# Altium PCB PCB.PcbDoc
Units mil, origin at the board's own origin, x right, y up, seen from the top; angles counter-clockwise.
Board outline 1625 x 590 mil, 4 copper layers (Top Layer, GND, 3V3, Bottom Layer), stack 23.756 mil thick; 40 components, 31 nets, 170 pads, 72 vias.
Unrouted connection lines stored in the file: 1.
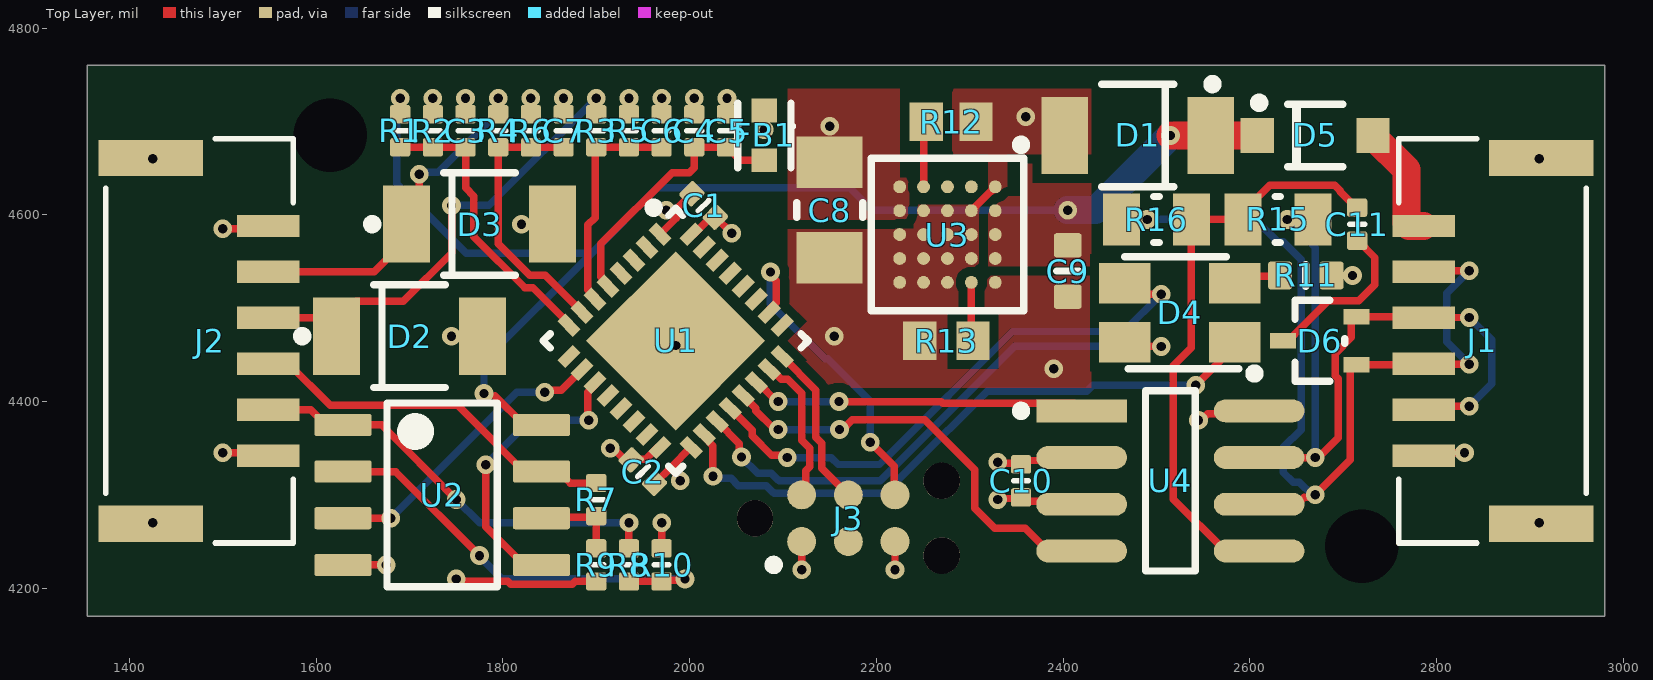
[diagram p0: Top Layer view]
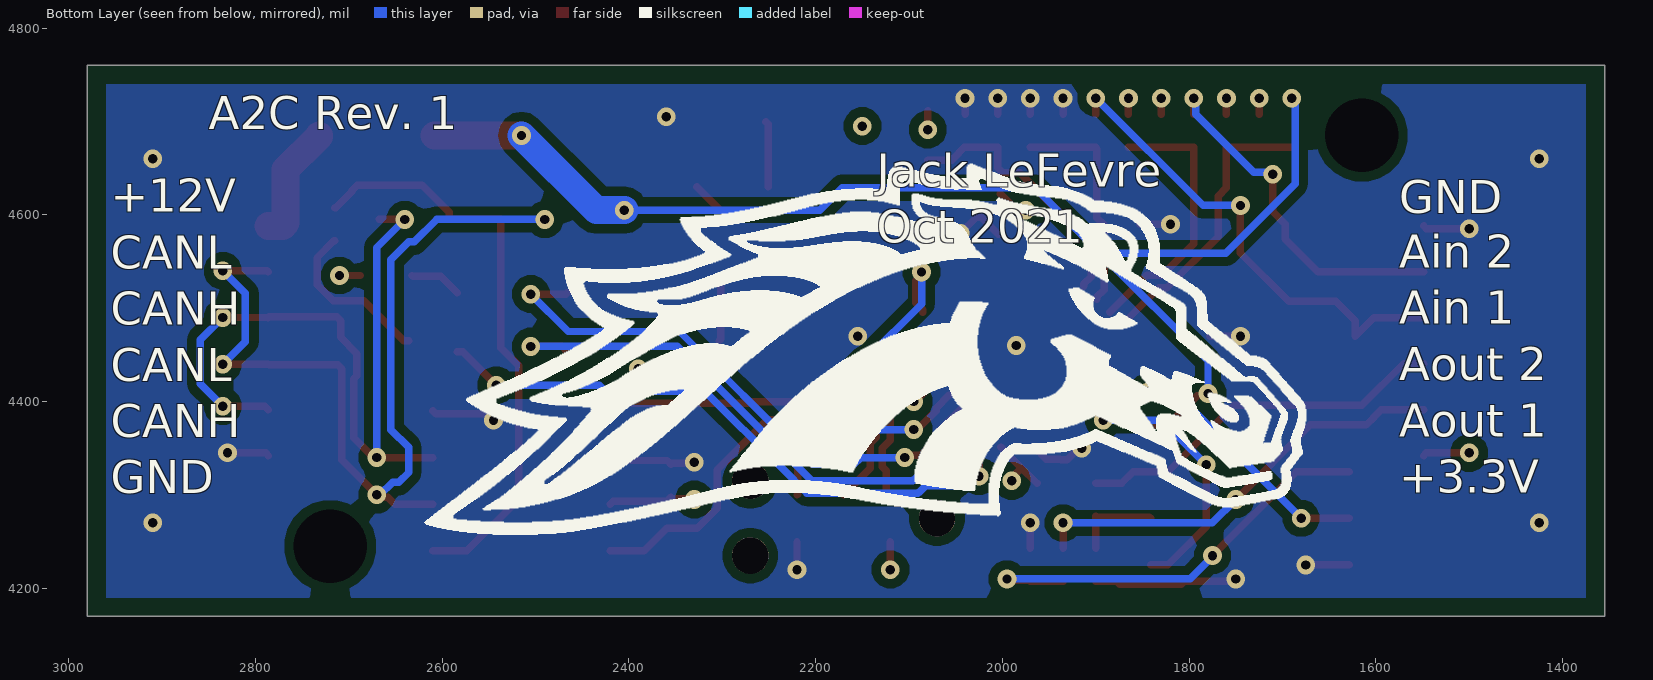
[diagram p1: Bottom Layer view, seen from below]
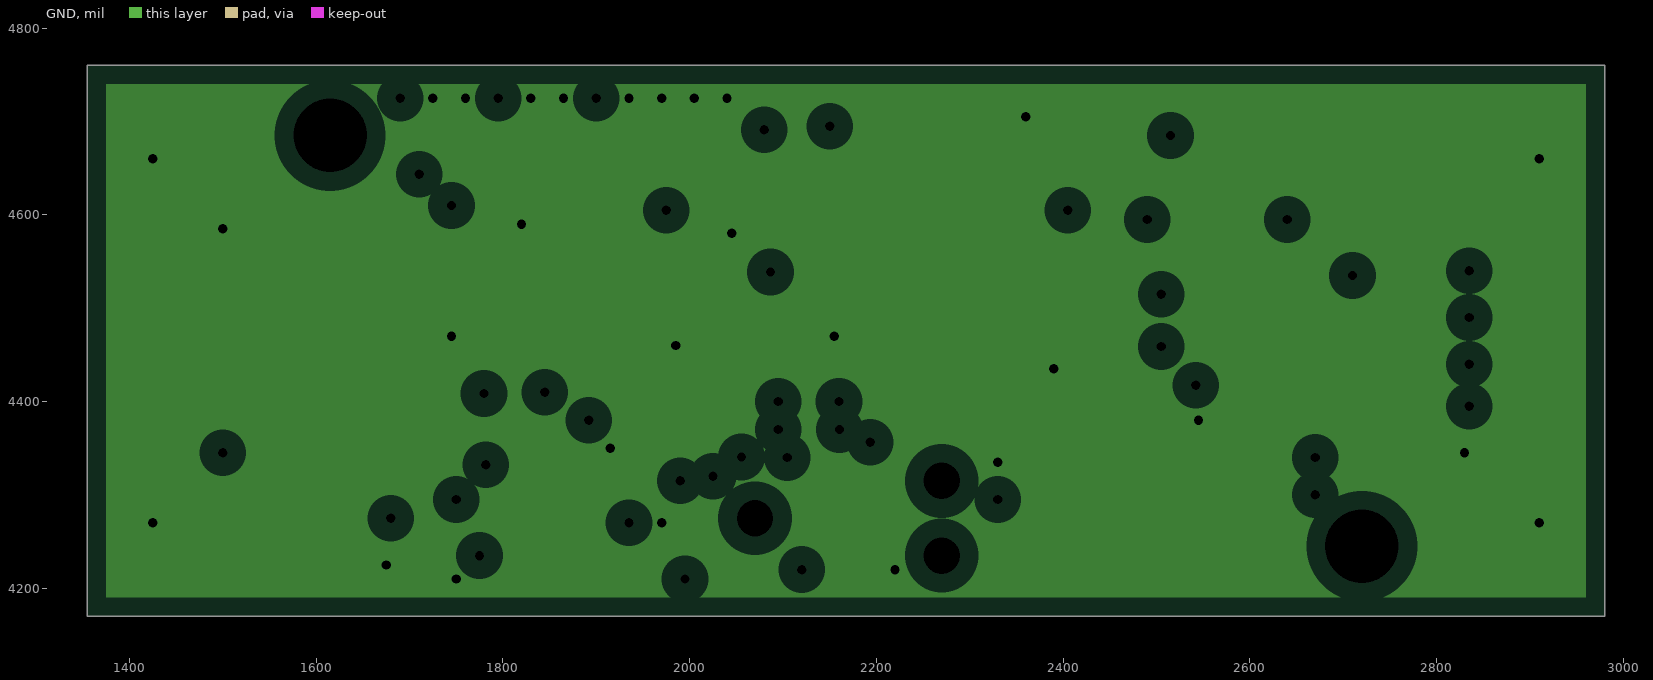
[diagram p2: GND, clearances drawn from the general rule]
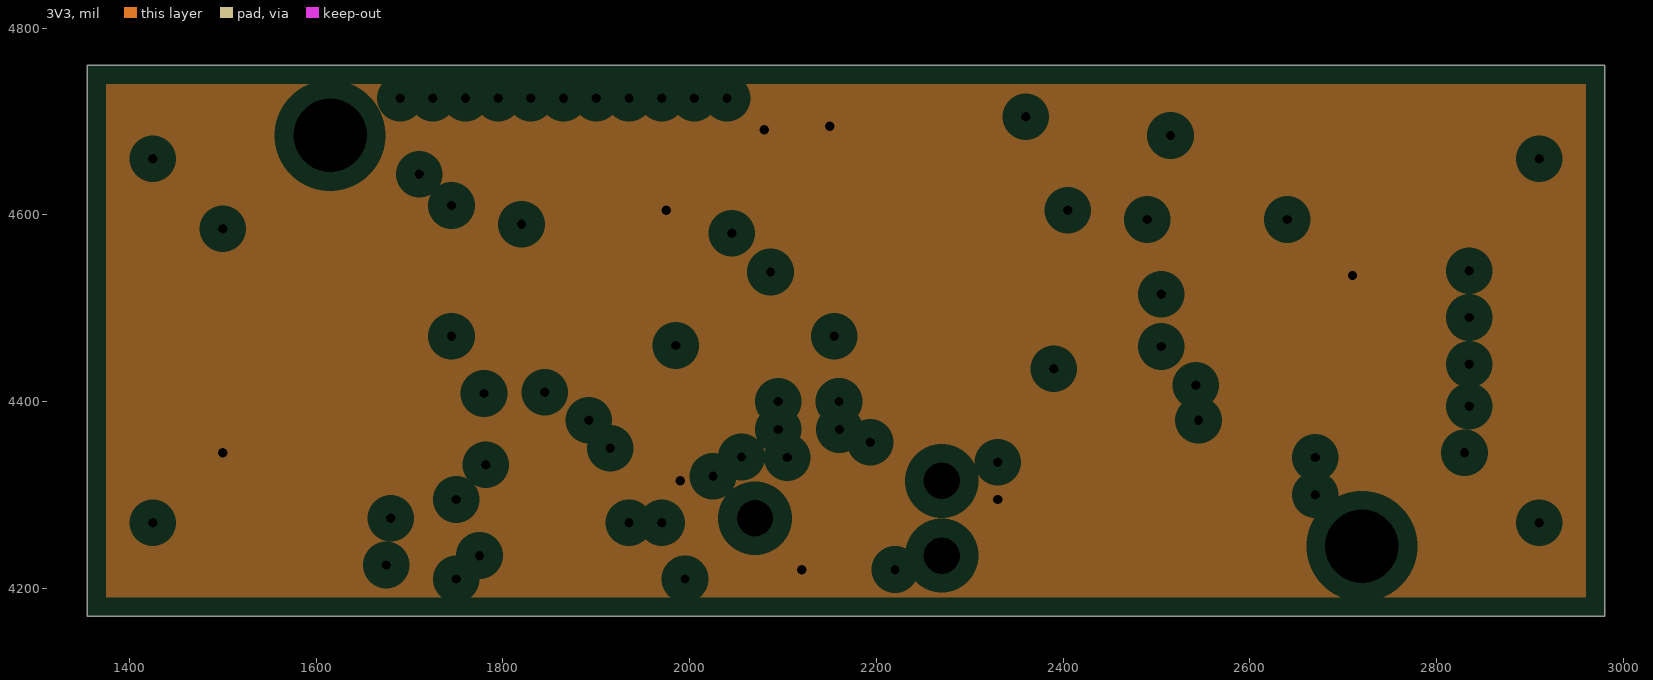
[diagram p3: 3V3, clearances drawn from the general rule]
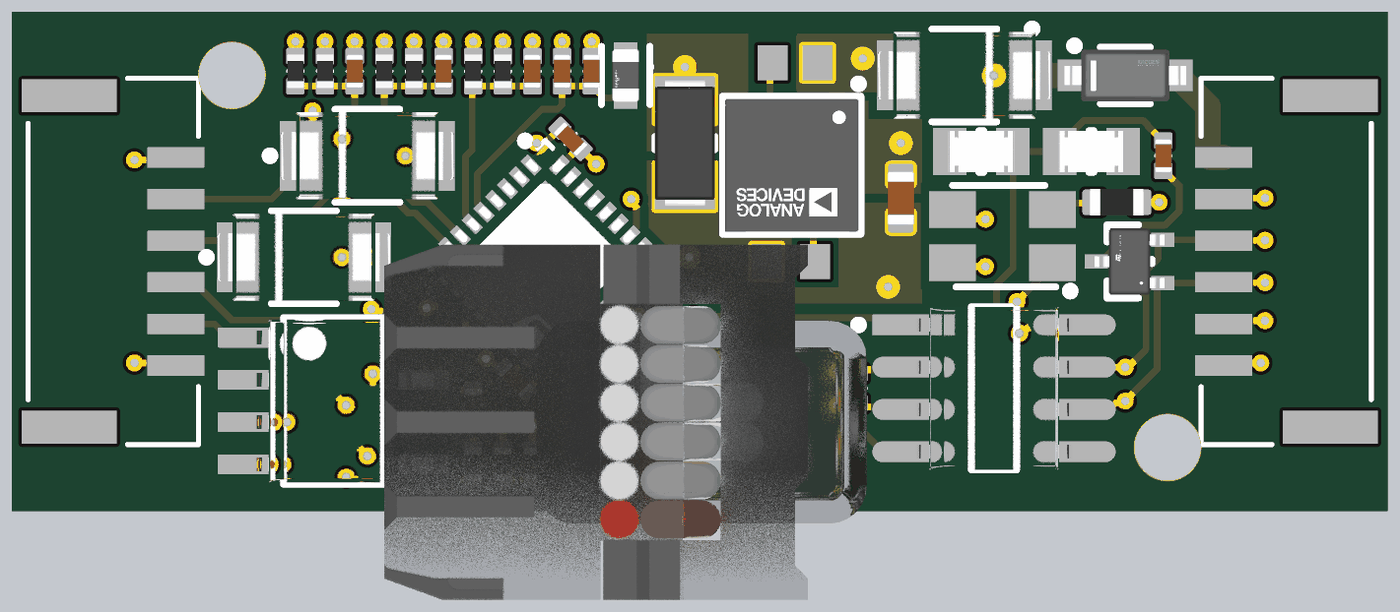
[diagram p4: 3D render of the assembled board from above, using the file's embedded part models]

## Layer stack, top to bottom
Top Solder: solder mask 0.4, Solder Resist, Dk 3.5
Top Layer: signal copper 1.4
Dielectric 2: prepreg 2.8, PP-006, Dk 4.1
GND: plane copper 1.378, net GND
Dielectric 1: dielectric 12.6, FR-4, Dk 4.8
3V3: plane copper 1.378, net 3V3
Dielectric 3: prepreg 2.8, PP-006, Dk 4.1
Bottom Layer: signal copper 1.4
Bottom Solder: solder mask 0.4, Solder Resist, Dk 3.5

## Board outline
1355,4760 2980,4760 2980,4170 1355,4170

## Design rules (kind name [scope] priority, off if disabled: settings)
Clearance [All] p1: gap=10 ignorepadtopadclearanceinfootprint=TRUE except(0: Arc-Hole Track-Hole SMDPad-Hole THPad-Hole Via-Hole Fill-Hole Poly-Hole Region-Hole Text-Hole; 5: Arc-Arc Arc-Track Arc-SMDPad Track-Track Track-SMDPad SMDPad-SMDPad)
PlaneClearance [All] p1: clearance=20
PlaneConnect [All] p1: pad.planeconnectstyle=Relief pad.reliefexpansion=20 pad.reliefentries=4 pad.reliefconductorwidth=10 pad.reliefairgap=10 via.planeconnectstyle=Direct via.reliefexpansion=20 via.reliefentries=4 via.reliefconductorwidth=10 via.reliefairgap=10
PolygonConnect [All] p1: connectstyle=Direct reliefconductorwidth=10 reliefentries=4 polygonreliefangle="90 Angle" airgapwidth=10
RoutingVias [All] p1: holewidth=10 width=20 viastyle="Through Hole" minholewidth=10 minwidth=20 maxholewidth=28 maxwidth=50
SolderMaskExpansion [All] p1: expansion=4 istentingtop=FALSE
Width [All] p1: maxlimit=30 minlimit=8 preferedwidth=8 minimp=50.000000 maximp=50.000000 favimp=50.000000
28 further rules are at their usual default settings.

## Classes and differential pairs
component class a2c: D5 J1 J2 J3
component class "Voltage regulator": C8 C9 R12 R13 U3
component class "CAN Transceiver": C10 C11 D6 R15 R16 U4
component class STM32: C1 C2 C3 C4 C5 C6 C7 D1 D2 D3 D4 FB1 R1 R2 R3 R4 R5 R6 R7 R8 R9 R10 R11 U1 U2

## Components (designator, comment, footprint, x,y, rotation, side; value= is the part's Value field where it differs from the comment)
C1 "100nF" CAPC0402(1005)60_L 2015,4610 r135 top
C2 "100nF" CAPC0402(1005)60_L 1950,4325 r135 top
C3 "100nF" CAPC0402(1005)60_L 1760,4690 r270 top
C4 "1uF" CAPC0402(1005)60_L 2005,4690 r90 top value=1µF
C5 "100nF" CAPC0402(1005)60_L 2040,4690 r90 top
C6 "100nF" CAPC0402(1005)60_L 1970,4690 r270 top
C7 "100nF" CAPC0402(1005)60_L 1865,4690 r270 top
C8 "TAJA106K016RNJ" CAPMP3217X18-T_V 2150,4605 r270 top value=10µF
C9 "Capacitor 1µF +/-40% 50V 0603" CAPC0603(1608)100_L 2405,4539.8 r90 top value=1µF
C10 "100nF" CAPC0402(1005)60_L 2355,4315 r90 top
C11 "100nF" CAPC0402(1005)60_L 2715,4590 r90 top
D1 "SMAJ15A" FP-SMA-MFG 2480,4685 r180 top
D2 "SMAJ6.0A" FP-SMA-MFG 1700,4470 r0 top
D3 "SMAJ6.0A" FP-SMA-MFG 1775,4590 r0 top
D4 "CLV1A-FKB-CHMKPEHBB7A363" FP-CLV1A-FKB-CHMKPEHBB7A3-MFG 2525,4495 r180 top
D5 "B140HW-7" FP-SOD123-MFG 2670,4685 r0 top value=120pF
D6 "ESDCAN02-2BWY" FP-SOT323-3L-MFG 2675,4465 r180 top value=3pF
FB1 "BLM18TG601TN1D" FP-BLM18-0_15-0_1-t0_6-MFG 2080,4685 r270 top
J1 "SM06B-GHS-TB(LF)(SN)" CONN_SM06B-GHS-TB_JST 2860,4465 r90 top
J2 "SM06B-GHS-TB(LF)(SN)" CONN_SM06B-GHS-TB_JST 1475,4465 r270 top
J3 "TC2030-CTX-NL" Tag_Connect_0_MFG 2170,4275 r0 top
R1 "Resistor 100K +/-1 % 0402 63 mW" RESC0402(1005)_L 1690,4690 r90 top value=100k
R2 "10K" RESC0402(1005)_L 1725,4690 r270 top value=10k
R3 "Resistor 5K6  +/-5 % 0402 63 mW" RESC0402(1005)_L 1900,4690 r270 top value=5.6k
R4 "Resistor 5K6  +/-5 % 0402 63 mW" RESC0402(1005)_L 1795,4690 r270 top value=5.6k
R5 "10K" RESC0402(1005)_L 1935,4690 r90 top value=10k
R6 "10K" RESC0402(1005)_L 1830,4690 r90 top value=10k
R7 "Resistor 5K6  +/-5 % 0402 63 mW" RESC0402(1005)_L 1900,4295 r90 top value=5.6k
R8 "Resistor 5K6  +/-5 % 0402 63 mW" RESC0402(1005)_L 1935,4225 r90 top value=5.6k
R9 "10K" RESC0402(1005)_L 1900,4225 r90 top value=10k
R10 "10K" RESC0402(1005)_L 1970,4225 r270 top value=10k
R11 "Resistor 120R +/-5 % 0603 0.1 W" RESC0603(1608)_L 2660,4535 r180 top value=120
R12 "76.8K" RESC1609X50X30ML10T20 2280,4699.8 r180 top
R13 "23.7K" RESC1608X55X30ML15T15 2275,4465 r0 top
R15 "59" FP-CRCW0805-e3-IPC_B 2630,4595 r0 top
R16 "59" FP-CRCW0805-e3-IPC_B 2500,4595 r0 top
U1 "STM32L432KCU6" FP-UFQFPN32-A0B8-MFG 1985,4465 r315 top
U2 "LM358DR" FP-D0008A-MFG 1735,4300 r0 top
U3 "LTM8074EY#PBF" FP-BGA-25-05-08-1566-MFG 2276.18,4578.82 r270 top
U4 "SN65HVD230DR" FP-D0008A-IPC_A 2515,4315 r0 top

## Footprints (in the part's own frame and the unit in brackets; to place one, negate y for a bottom-side part, rotate by r counter-clockwise, add the part's x,y. Pads: shape width x height; smd on the part's side, far side on the other; paste and mask are expansions set on the pad)
CAPC0402(1005)60_L [mm] "Chip Capacitor, Body 1.0x0.5mm, Height 0.6mm, IPC High Density"
  rrect25% 0.5x0.55 smd: 1(-0.45,0) 2(0.45,0)
  silkscreen extent 0,-0.2 0,0.2, body extent -0.5,-0.25 0.5,0.25, height 0.6
CAPC0603(1608)100_L [mm] "Chip Capacitor, Body 1.6x0.8mm, Height 1.0mm, IPC High Density"
  rrect25% 0.66x0.76 smd: 1(-0.7,0) 2(0.7,0)
  silkscreen extent 0,-0.3 0,0.3, body extent -0.8,-0.4 0.8,0.4, height 0.95
CAPMP3217X18-T_V [mm] "Molded Capacitor, 2-Leads, Body 3.40x1.8mm"
  rect 1.4x1.8 smd: 1(-1.3,0) 2(1.3,0)
  silkscreen extent -2.34,-1.07 0.2,0.9, body extent -1.92,-0.9 1.92,0.9, height 1.8
CONN_SM06B-GHS-TB_JST [mil]
  rect 24x67 smd paste+0 mask+0: 1(-123.03,73.85) 2(-73.82,73.85) 3(-24.61,73.85) 4(24.61,73.85) 5(73.82,73.85) 6(123.03,73.85)
  rect 39x112 smd: 7(-195.87,-52.14) 8(195.87,-52.14)
  silkscreen extent -216,-101 216,101, body extent 0,0 10,10, height 10
FP-BGA-25-05-08-1566-MFG [mm]
  round 0.35 smd paste+0 mask+0: A1(-1.3,1.3) A2(-0.65,1.3) A3(0,1.3) A4(0.65,1.3) A5(1.3,1.3) B1(-1.3,0.65) B2(-0.65,0.65) B3(0,0.65) B4(0.65,0.65) B5(1.3,0.65) C1(-1.3,0) C2(-0.65,0) C3(0,0) C4(0.65,0) C5(1.3,0) D1(-1.3,-0.65) D2(-0.65,-0.65) D3(0,-0.65) D4(0.65,-0.65) D5(1.3,-0.65) E1(-1.3,-1.3) E2(-0.65,-1.3) E3(0,-1.3) E4(0.65,-1.3) E5(1.3,-1.3)
  silkscreen extent -2.57,-2.07 2.07,2.13, body extent -2.58,-2.58 2.58,2.58, height 0.25
FP-BLM18-0_15-0_1-t0_6-MFG [mm]
  rect 0.65x0.7 smd paste+0 mask+0: 1(-0.675,0) 2(0.675,0)
  silkscreen extent -0.87,-0.72 0.87,0.72, body extent -1.1,-0.58 1.1,0.58, height 0.25
FP-CLV1A-FKB-CHMKPEHBB7A3-MFG [mm]
  rect 1.4x1.1 smd paste+0 mask+0: 1(-1.5,0.8) 2(-1.5,-0.8) 3(1.5,-0.8) 4(1.5,0.8)
  silkscreen extent -2.16,-1.52 1.5,1.78
FP-CRCW0805-e3-IPC_B [mil]
  rect 39.63x55.44 smd paste+0 mask+0: 1(-37.44,0) 2(37.44,0)
  silkscreen extent -3,-25 3,25, body extent -67,-38 67,38, height 10
FP-D0008A-IPC_A [mil]
  rect 97.21x24.49 smd paste+0 mask+0: 1(-95.02,75)
  rrect100% 97.21x24.49 smd paste+0 mask+0: 2(-95.02,25) 3(-95.02,-25) 4(-95.02,-75) 5(95.02,-75) 6(95.02,-25) 7(95.02,25) 8(95.02,75)
  silkscreen extent -165,-97 27,97, body extent -163,-116 163,116, height 10
FP-D0008A-MFG [mm]
  rrect17% 1.55x0.6 smd paste+0 mask+0: 1(-2.7,1.905) 2(-2.7,0.635) 3(-2.7,-0.635) 4(-2.7,-1.905) 5(2.7,-1.905) 6(2.7,-0.635) 7(2.7,0.635) 8(2.7,1.905)
  silkscreen extent -1.5,-2.5 1.5,2.5, body extent -3.57,-2.75 3.57,2.75, height 0.25
FP-SMA-MFG [mm]
  rect 1.27x2.1 smd paste+0 mask+0: 1(-1.985,0) 2(1.985,0)
  silkscreen extent -2.16,-1.52 0.97,1.4, body extent -2.72,-1.5 2.72,1.5, height 0.25
FP-SOD123-MFG [mm]
  rect 0.9x0.95 smd paste+0 mask+0: 1(-1.575,0) 2(1.575,0)
  silkscreen extent -1.65,-0.85 0.75,1.01, body extent -2.12,-0.95 2.12,0.95, height 0.25
FP-SOT323-3L-MFG [mm]
  rect 0.7x0.42 smd paste+0 mask+0: 1(-1,0.65) 2(-1,-0.65) 3(1,0)
  silkscreen extent -0.67,-1.1 0.67,1.1, body extent -1.45,-1.2 1.45,1.2, height 0.25
FP-UFQFPN32-A0B8-MFG [mm]
  rect 0.6x0.3 smd paste+0 mask+0: 1(-2.35,1.75) 2(-2.35,1.25) 3(-2.35,0.75) 4(-2.35,0.25) 5(-2.35,-0.25) 6(-2.35,-0.75) 7(-2.35,-1.25) 8(-2.35,-1.75) 17(2.35,-1.75) 18(2.35,-1.25) 19(2.35,-0.75) 20(2.35,-0.25) 21(2.35,0.25) 22(2.35,0.75) 23(2.35,1.25) 24(2.35,1.75)
  rect 0.3x0.6 smd paste+0 mask+0: 9(-1.75,-2.35) 10(-1.25,-2.35) 11(-0.75,-2.35) 12(-0.25,-2.35) 13(0.25,-2.35) 14(0.75,-2.35) 15(1.25,-2.35) 16(1.75,-2.35) 25(1.75,2.35) 26(1.25,2.35) 27(0.75,2.35) 28(0.25,2.35) 29(-0.25,2.35) 30(-0.75,2.35) 31(-1.25,2.35) 32(-1.75,2.35)
  rect 3.45x3.45 smd paste+0 mask+0: 33(0,0)
  silkscreen extent -3.11,-2.55 2.55,2.55, body extent -2.75,-2.75 2.75,2.75, height 0.25
RESC0402(1005)_L [mm] "Chip Resistor, Body 1.0x0.5mm, IPC High Density"
  rrect25% 0.5x0.55 smd: 1(-0.45,0) 2(0.45,0)
  silkscreen extent 0,-0.2 0,0.2, body extent -0.5,-0.25 0.5,0.25, height 0.3
RESC0603(1608)_L [mm] "Chip Resistor, Body 1.6x0.8mm, IPC High Density"
  rrect25% 0.66x0.76 smd: 1(-0.7,0) 2(0.7,0)
  silkscreen extent 0,-0.3 0,0.3, body extent -0.8,-0.4 0.8,0.4, height 0.45
RESC1608X55X30ML15T15 [mm] "Chip Resistor, 2-Leads, Body 1.60x0.80mm, IPC Low Density"
  rect 0.9x1.05 smd: 1(-0.725,0) 2(0.725,0)
  body extent -0.87,-0.48 0.87,0.48, height 0.55
RESC1609X50X30ML10T20 [mm] "Chip Resistor, 2-Leads, Body 1.55x0.85mm, IPC Low Density"
  rect 0.9x1.05 smd: 1(-0.675,0) 2(0.675,0)
  body extent -0.82,-0.48 0.82,0.48, height 0.5
Tag_Connect_0_MFG [mil]
  round 30.98 smd paste-39370.1 mask+0: 1(-50,-25) 2(-50,25) 3(0,-25) 4(0,25) 5(50,-25) 6(50,25)
  round 39.02 hole 39.02 unplated paste-39370.1 mask+0: ""(-100,0) ""(100,-40) ""(100,40)
  silkscreen extent -85,-55 -75,-45, body extent -199,-124 199,124, height 10

## Part data
C1 C2 C3 C5 C6 C7 C10 C11: library part CMP-001-00061-2, "Chip Capacitor, 100nF +/-20%, 10V, 0402, Thickness 0.6 mm", Case/Package=0402, Max Operating Temperature=85°C, Min Operating Temperature=-55°C, Tolerance=20%, Voltage Rating=10V, Mounting Technology=SMT, Pins=2
C4: library part CMP-001-00063-2, "Chip Capacitor, 1µF +/-20%, 10V, 0402, Thickness 0.6 mm", Case/Package=0402, Max Operating Temperature=85°C, Min Operating Temperature=-55°C, Tolerance=10%, Voltage Rating=10V, Mounting Technology=SMT, Pins=2
C8: library part CMP-001-00041-6, "Standard Tantalum, 10 uF, +/- 10%, 16 V, -55 to 125 degC, 1206 (3216 Metric), RoHS, Tape and Reel", Capacitor Type=Tantalum, Case/Package=1206, Manufacturer=AVX, Max Operating Temperature=125°C, Min Operating Temperature=-55°C, Package Description="2-Pin Surface Mount Device, Body 3.2 x 1.65 mm", Package Quantity=1, Package Reference=CAPMP3217X18-T, Tolerance=10%, Voltage Rating=16V, Datasheet URL=http://datasheets.avx.com/TAJ.pdf, Datasheet Version=Feb-16, ESR=3Ohm, Manufacturer URL=http://www.avx.com/, Mounting Technology=SM, Package URL=http://www.avx.com/download/software/literature/AVX-Footprint-Library.pdf, Packaging=TapeandReel, Pins=2, RoHS Compliant=True
C9: library part CMP-001-00078-3, "Chip Capacitor, 1µF +/-40%, 50V, 0603, Thickness 1 mm", Case/Package=0603, Max Operating Temperature=85°C, Min Operating Temperature=-55°C, Tolerance=10%, Voltage Rating=50V, Mounting Technology=SMT, Pins=2
D1: library part CMP-07401-000026-1, "TVS DIODE 15V 24.4V SMA", Breakdown Voltage=16.7V, Clamping Voltage=24.4V, Manufacturer="Bourns Inc.", Max Junction Temp=+150°C, Package=SMA, Peak Pulse Current=16.4A, Peak Pulse Power=400W, Reverse Standoff Voltage=15V, Temperature="-55°C to +150°C", Temperature Range Low=-55°C, Automotive=No, Category=Diode, ComponentLink2Description=Datasheet, ComponentLink2URL=https://www.bourns.com/docs/Product-Datasheets/SMAJ.pdf, Device Class L1="Circuit Protection", Device Class L2="TVS Diodes", Device Class L3=unset, Digikey Description="TVS DIODE 15V 24.4V SMA", Direction=Unidirectional, Height=2.29mm, Lead Free=Yes, Manufacturer Part Number=SMAJ15A, Mouser Description="Bourns Smaj15a / Diode Tvs 15v 400w Uni 5% Smd Bourns", Number Of Channels=1, Octopart=https://octopart.com/smaj15a-bourns-12809353, RoHS=TRUE, Temperature Range High=+150°C
D2 D3: library part CMP-07401-000002-1, "TVS DIODE 6V 10.3V SMA", Breakdown Voltage=6.67V, Clamping Voltage=10.3V, Manufacturer="Bourns Inc.", Max Junction Temp=+150°C, Package=SMA, Peak Pulse Current=38.8A, Peak Pulse Power=400W, Reverse Standoff Voltage=6V, Temperature="-55°C to +150°C", Temperature Range Low=-55°C, Automotive=No, Category=Diode, ComponentLink2Description=Datasheet, ComponentLink2URL=https://www.bourns.com/docs/product-datasheets/smaj.pdf?sfvrsn=d2266a96_11, Device Class L1="Circuit Protection", Device Class L2="TVS Diodes", Device Class L3=unset, Digikey Description="TVS DIODE 6V 10.3V SMA", Direction=Unidirectional, Height=2.29mm, Lead Free=Yes, Manufacturer Part Number=SMAJ6.0A, Mouser Description="Diode TVS Single Uni-Dir 6V 400W 2-Pin SMA T/R", Number Of Channels=1, Octopart=https://octopart.com/smaj6.0a-bourns-12809397, RoHS=TRUE, Temperature Range High=+150°C
D4: library part CMP-13977-000017-1, "LED RGB 4PLCC SMD", Case/Package=PLCC, Color=Blue, Forward Current=20mA, Forward Voltage=3.2V, Lens Color=White, Max Operating Temperature=100°C, Min Operating Temperature=-40°C, Package Quantity=2000, Reverse Voltage=5V, Depth=3.2mm, Dominant Wavelength=470nm, Height=2.1mm, Length=2.8mm, Lens Style=Round, Lens Transparency=Diffused, Luminous Intensity=315mcd, Mount="Surface Mount", Number of Elements=3, Number of LEDs=1, Number of Pins=4, Packaging="Tape and Reel", Radiation Hardening=No, Test Current=20mA, Viewing Angle=120°, Width=2.8mm
D5: library part CMP-12790-000013-1, "DIODE SCHOTTKY 40V 1A SOD123", Capacitance=120pF, Forward Current=1A, Manufacturer="Diodes Inc.", Max Junction Temp=+125°C, Max Repetitive Reverse Voltage=40V, Max Surge Forward Current=16A, Package=SOD123, Peak Reverse Current=40uA, Temperature="-65°C to +125°C", Temperature Range Low=-65°C, Automotive=No, Category=Diode, ComponentLink2Description=Datasheet, ComponentLink2URL=https://www.diodes.com/assets/Datasheets/ds30670.pdf, Device Class L1="Discrete Semiconductors", Device Class L2=Diodes, Device Class L3="Schottky Diodes", Digikey Description="DIODE SCHOTTKY 40V 1A SOD123", Footprint Url=https://www.diodes.com/assets/Package-Files/SOD123.pdf, Height=1.45mm, Ipc Land Pattern Name=SOD365155X110-2, Lead Free=Yes, Manufacturer Part Number=B140HW-7, Mouser Description="Schottky Diodes & Rectifiers SCHOTTKY RECTIFIER SOD-123 1.0A 40V", Octopart=https://octopart.com/b140hw-7-diodes+inc.-325751, Reverse Voltage=40V, RoHS=TRUE, Standoff Height=0mm, Temperature Range High=+125°C
D6: library part CMP-12225-000055-1, "TVS DIODE 26.5V 44V SOT323-3", Breakdown Voltage=28.5V, Capacitance=3pF, Clamping Voltage=44V, Manufacturer=STMicroelectronics, Max Junction Temp=+175°C, Package=SOT323-3L, Peak Pulse Current=3A, Peak Pulse Power=170W, Reverse Standoff Voltage=26.5V, Temperature="-55°C to +175°C", Temperature Range Low=-55°C, Automotive=Yes, Automotive Grade="Grade 0", Category=Diode, ComponentLink2Description=Datasheet, ComponentLink2URL=https://www.st.com/resource/en/datasheet/esdcan02-2bwy.pdf, Device Class L1="Circuit Protection", Device Class L2="TVS Diodes", Device Class L3=unset, Digikey Description="TVS DIODE 26.5V 44V SOT323-3", Direction=Bidirectional, Height=1.1mm, Ipc Land Pattern Name=SOT65P210X95-3, Lead Free=Yes, Manufacturer Part Number=ESDCAN02-2BWY, Mouser Description="TVS Diodes / ESD Suppressors Automotive dual-line Transil, Transient voltage suppressor (TVS) for CAN bus", Number Of Channels=2, Octopart=https://octopart.com/esdcan02-2bwy-stmicroelectronics-58631133, RoHS=TRUE, Standoff Height=0mm, Temperature Range High=+175°C
FB1: library part CMP-0686-00527-3, "FERRITE BEAD 600 OHM 0603 1LN", Case Code (Imperial)=0603, Case Code (Metric)=1608, Current Rating=200mA, DC Resistance (DCR)=450mR, Max Operating Temperature=125°C, Min Operating Temperature=-55°C, Package Quantity=10000, Test Frequency=100MHz, Tolerance=25%, Case/Package=0603, Depth=0.8mm, Height=0.8mm, Impedance=600R, Lead Free="Lead Free", Length=1.6mm, Material=Steel, Max Current Rating=200mA, Max DC Current=200mA, Number of Circuits=1, Number of Lines=1, Number of Pins=2, Packaging="Tape and Reel", REACH SVHC="No SVHC", Termination=SMD/SMT, Width=0.8mm
J1 J2: "No Description Available", Current Rating=1A, Manufacturer=JST, Manufacturer Part Number=B6B-ZR-SM4-TF(LF)(SN), Temperature="-25°C to +85°C", Temperature Range High=+85°C, Temperature Range Low=-25°C, Automotive=No, Category=Conn, ComponentLink2Description=Datasheet, ComponentLink2URL=http://www.jst-mfg.com/product/pdf/eng/eZH.pdf, Conn Gender=Male, Conn Orientation=Straight, Contact Material=Tin, Copyright="Copyright (C) 2021 Ultra Librarian. All rights reserved.", Device Class L1=Connectors, Device Class L2="Board to Board Connectors", Device Class L3=unset, Digi-Key_Part_Number_1=455-1568-2-ND, Digi-Key_Part_Number_2=455-1568-1-ND, Digi-Key_Part_Number_3=455-1568-6-ND, Digikey Description="CONN HEADER SMD 6POS 1.5MM", Height=5mm, Lead Free=Yes, Manufacturer_Part_Number=SM06B-GHS-TB(LF)(SN), Mfr_Name=JST, Number Of Contacts=6, Number Of Rows=1, Octopart=https://octopart.com/b6b-zr-sm4-tf%28lf%29%28sn%29-jst-248849, Package=B6B-ZR-SM4-TF(LF)(SN), Pitch=1.5mm, RefDes=RefDes, RoHS=TRUE, Type=DEV
R1: library part CMP-009-00168-2, "Chip Resistor, 100 kOhms, +/-1 %, 63 mW, -55 to 155 degC, 0402", Case/Package=0402, Max Operating Temperature=155°C, Min Operating Temperature=-55°C, Power=63mW, Tolerance=1%, Pins=2
R2 R5 R6 R9 R10: library part CMP-009-00149-2, "Chip Resistor, 10 kOhms, +/-1 %, 63 mW, -55 to 125 degC, 0402", Case/Package=0402, Max Operating Temperature=155°C, Min Operating Temperature=-55°C, Power=63mW, Tolerance=1%, Pins=2
R3 R4 R7 R8: library part CMP-009-00136-2, "Chip Resistor, 5,6 kOhms, +/-5 %, 63 mW, -55 to 155 degC, 0402", Case/Package=0402, Max Operating Temperature=155°C, Min Operating Temperature=-55°C, Power=63mW, Tolerance=5%, Pins=2
R11: library part CMP-009-00176-2, "Chip Resistor, 120 Ohms, +/-5 %, 0.1 W, -55 to 155 degC, 0603", Case/Package=0603, Max Operating Temperature=155°C, Min Operating Temperature=-55°C, Power=100mW, Tolerance=5%, Pins=2
R12: library part CMP-1012-00723-2, Manufacturer="Vishay Dale", Part Number=CRCW060376K8FKEA
R13: library part CMP-2000-00357-1, Manufacturer=Panasonic, Part Number=ERJ-3EKF2372V
R15 R16: library part CMP-02407-002414-1, "RES Thick Film, 59Ω, 1%, 0.125W, 100ppm/°C, 0805", Case Code (Imperial)=0805, Case Code (Metric)=2012, Max Operating Temperature=155°C, Max Power Dissipation=125mW, Min Operating Temperature=-55°C, Package Quantity=10, Resistance=59R, Temperature Coefficient=100ppm/°C, Tolerance=1%, Voltage Rating=150V, Case/Package=0805, Composition="Thick Film", Contact Plating=Tin, Depth=1.25mm, Features="Automotive AEC-Q200", Height=0.02inch, Lead Free="Lead Free", Length=2mm, Military Standard=Not, Mount="Surface Mount", Number of Pins=2, Number of Terminations=2, Packaging="Tape and Reel", Power Rating=125mW, Radiation Hardening=No, Termination=SMD/SMT, Voltage Rating (DC)=150V, Weight=0.000194oz, Width=1.25mm
U1: library part CMP-12105-000033-1, "IC MCU 32BIT 256KB FLASH 32QFPN", Ambient Temperature Range High=+85°C, Ambient Temperature Range Low=-40°C, Frequency=80MHz, Manufacturer=STMicroelectronics, Max Junction Temp=+105°C, Max Supply Voltage=3.6V, Min Supply Voltage=1.62V, Package=UFQFPN32-A0B8, Temperature="-40°C to +105°C", Automotive=No, Category=IC, ComponentLink2Description=Datasheet, ComponentLink2URL=https://www.st.com/content/ccc/resource/technical/document/datasheet/24/01/9f/59/f0/83/47/fc/DM00257205.pdf/files/DM00257205.pdf/jcr:content/translations/en.DM00257205.pdf, Core Architecture="ARM Cortex-M4", Data Bus Width=32bits, Device Class L1="Integrated Circuits (ICs)", Device Class L2="Embedded Processors and Controllers", Device Class L3=Microcontrollers, Digikey Description="IC MCU 32BIT 256KB FLASH 32QFPN", Height=0.6mm, Interface=I2C,SPI,UART,USART,CAN,USB,LIN,IrDA,Other, Lead Free=Yes, Manufacturer Part Number=STM32L432KCU6, Memory Size=256KBytes, Memory Type=FLASH, Number Of A/D Converters=1, Number Of Adc Channels=11, Number Of Cores=1, Number Of I2C Channels=2, Number of I/Os=26, Number Of Pwm Channels=1, Number Of Spi Channels=2, Number Of Timers/Counters=11, Number Of Uart Channels=3, Number Of Usb Channels=1, Octopart=https://octopart.com/stm32l432kcu6-stmicroelectronics-71093510, Ram Size=64KBytes, RoHS=TRUE, Temperature Range High=+105°C, Temperature Range Low=-40°C
U2: library part CMP-1685-00009-2, "IC OPAMP GP 2 CIRCUIT 8SOIC", Case/Package=SOIC, Dual Supply Voltage=9V, Input Bias Current=250nA, Input Offset Voltage (Vos)=7mV, Max Dual Supply Voltage=16V, Max Operating Temperature=70°C, Max Supply Voltage=32V, Min Dual Supply Voltage=1.5V, Min Operating Temperature=0°C, Min Supply Voltage=3V, Nominal Supply Current=1.2mA, Operating Supply Current=1mA, Output Current=30mA, Package Quantity=2500, Power Supply Rejection Ratio (PSRR)=65dB, Voltage Gain=100dB, Bandwidth=700kHz, Common Mode Rejection Ratio=65dB, Contact Plating=Gold, Gain Bandwidth Product=700kHz, Height=1.58mm, Lead Free="Lead Free", Length=4.9mm, Mount="Surface Mount", Number of Amplifiers=2, Number Of Channels=2, Number of Circuits=2, Number of Elements=2, Number of Pins=8, Operating Supply Voltage=16V, Output Current per Channel=30mA, Packaging="Tape and Reel", Radiation Hardening=No, REACH SVHC="No SVHC", Slew Rate=0.3V/µs, Unity Gain Bandwidth Product=700kHz, Width=3.91mm
U3: library part CMP-09139-000015-1, "IC REG BUCK ADJ 1.2A 25BGA", Manufacturer="Analog Devices", Max Junction Temp=+125°C, Max Supply Voltage=40V, Min Supply Voltage=3.2V, Nominal Supply Current=3-8uA, Output Current=1.2A, Output Voltage=0.8-12V, Package=BGA-25-05-08-1566, Switching Frequency=200-2200kHz, Temperature="-40°C to +125°C", Temperature Range Low=-40°C, Automotive=No, Category=IC, ComponentLink2Description=Datasheet, ComponentLink2URL=https://www.analog.com/media/en/technical-documentation/data-sheets/LTM8074.pdf, Device Class L1="Integrated Circuits (ICs)", Device Class L2="Power Management ICs", Device Class L3="Voltage Regulators - Switching", Digikey Description="IC REG BUCK ADJ 1.2A 25BGA", Height=1.98mm, Ipc Land Pattern Name=BGA25N65P5X5_400X400X182, Lead Free=Yes, Manufacturer Part Number=LTM8074EY#PBF, Mouser Description="Conv DC-DC 3.2V to 40V Step Down Single-Out 0.8V to 12V 1.2A uModule Automotive 25-Pin BGA Tray", Number Of Outputs=1, Octopart=https://octopart.com/ltm8074ey%23pbf-analog+devices-95880170, Output Type=AdjustableProgrammable, RoHS=TRUE, Standoff Height=0.23mm, Switching Topology=Buck, Temperature Range High=+125°C
U4: library part CMP-0315-00015-3, "IC TRANSCEIVER HALF 1/1 8SOIC", Case/Package=D, Max Operating Temperature=85°C, Max Supply Current=17mA, Max Supply Voltage=3.6V, Min Operating Temperature=-40°C, Min Supply Voltage=3V, Operating Supply Voltage=3.3V, Package Quantity=1, Contact Plating=Gold, Data Rate=1Mbps, Lead Free="Lead Free", Nominal Supply Current=17mA, Number of Drivers=1, Number of I/Os=2, Number of Pins=8, Number of Receive Buffers=1, Number of Receivers=1, Number of Transceivers=1, Number of Transmit Buffers=1, Packaging="Tape and Reel", Radiation Hardening=No, REACH SVHC="No SVHC", Termination=SMD/SMT, Weight=0.002561oz

## Free pads (board coordinates)
  round 60 hole 78.74 mask+4: 1(1615,4685) 2(2720,4245)

## Via types
v1: diameter 20, hole 10, Top Layer to Bottom Layer, 72 vias

## Nets (pads, with @x,y where several pads share a name; then routed paths per layer and width w, separated by ;. In a path a pad name is that pad's centre, name@x,y a point inside that pad or via, vN(x,y) a via of type N, cw(c..) or ccw(c..) an arc to the next point about the centre after c; other vN are vias at no path point)
3V3: C1.2 C2.1 C8.1 C10.1 FB1.1 J2.6 J3.1 R11.1 U1.1 U1.4 U1.17 U3.E1 U3.E2 U4.3 | length 356
  Top Layer w8: v1(1500,4345) 1545.82,4345 J2.6 ; C2.1 1962.92,4312.47 1980.22,4329.78 ; U1.1 1985.71,4596.55 1985.71,4601.16 1984.17,4602.7 1977.3,4602.7 v1(1975,4605) ; 1985.71,4605.77 C1.2 ; v1(1990,4315) 1990,4318.25 1980.22,4328.02 1980.22,4329.78 ; U1.17 2001.31,4350.86 1980.22,4329.78 ; v1(2080,4691.22) FB1.1 ; v1(2120,4220) J3.1 ; v1(2330,4295) 2331.14,4296.14 2353.86,4296.14 C10.1 2359.13,4293.16 2416.82,4293.16 U4.3 ; R11.1 v1(2710,4535)
  other v1: 2150,4695
ADC_1: C6.2 R3.2 R5.1 U1.6 | length 239.6
  Top Layer w8: U1.6 1898.7,4512.24 1891.09,4519.85 1891.09,4589.34 1898.7,4596.95 1898.7,4670.98 R3.2 R5.1 C6.2
ADC_2: C7.2 R4.2 R6.1 U1.7 | length 293.4
  Top Layer w8: C7.2 R6.1 R4.2 1795,4569.08 1828.97,4535.11 1845.29,4535.11 U1.7
ADC_Vin: C3.2 R1.1 R2.2 U1.8 | length 311.3
  Top Layer w8: R1.1 R2.2 C3.2 1760,4628.94 1769,4619.94 1769,4576.7 1823.58,4522.11 1831.83,4522.11 1870.86,4483.08 U1.8
Ain_1: D2.1 J2.3 R3.1 | length 521.6
  Top Layer w8: J2.3 1602.24,4489.61 D2.1 1621.85,4486.34 1642.85,4507.34 1693.26,4507.34 1745,4559.08 v1(1745,4610) ; R3.1 v1(1900,4725)
  Bottom Layer w8: v1(1745,4610) 1785,4610 v1(1900,4725)
Ain_2: D3.1 J2.2 R4.1 | length 382.2
  Top Layer w8: J2.2 1662.01,4538.82 1696.85,4573.66 D3.1 1710.43,4603.58 v1(1710.43,4643.31) ; R4.1 v1(1795,4725)
  Bottom Layer w8: v1(1710.43,4643.31) 1712.73,4645.61 1730.61,4645.61 1792.7,4707.7 1792.7,4722.7 v1(1795,4725)
Aout_1: J2.5 R8.2 U2.1 | length 463.9
  Top Layer w8: J2.5 1594.35,4391.18 1602.19,4383.34 1602.19,4382.81 1610,4375 U2.1 1670,4375 v1(1750,4295) ; R8.2 v1(1935,4270)
  Bottom Layer w8: v1(1750,4295) 1775,4270 v1(1935,4270)
Aout_2: J2.4 R7.2 U2.7 | length 404
  Top Layer w8: J2.4 1570.35,4440.39 1614.93,4395.81 1751.79,4395.81 1822.6,4325 U2.7 1860,4325 1872.28,4312.72 R7.2
DAC_1: U1.10 U2.3 | length 322.1
  Top Layer w8: U2.3 v1(1680,4275) ; v1(1845,4410) 1847.3,4412.3 1862.7,4412.3 U1.10
  Bottom Layer w8: v1(1680,4275) 1815,4410 v1(1845,4410)
DAC_2: U1.11 U2.5 | length 316.9
  Top Layer w8: v1(1781.49,4332.17) 1781.49,4266.11 1822.6,4225 U2.5 ; v1(1891.81,4380) 1891.09,4380.72 1891.09,4410.15 1898.7,4417.76 U1.11
  Bottom Layer w8: v1(1781.49,4332.17) 1829.32,4380 v1(1891.81,4380)
GND: C1.1 C2.2 C3.1 C4.2 C5.2 C6.1 C7.1 C8.2 C9.1 C10.2 D1.2 D2.2 D3.2 J1.1 J1.7 J1.8 J2.1 J2.7 J2.8 J3.5 R2.1 R5.2 R6.2 R9.1 R10.1 R12.1 R13.1 U1.16 U1.32 U1.33 U2.4 U3.A1 U3.A5 U3.B2 U3.B3 U3.B4 U3.C2 U3.C3 U3.C4 U3.C5 U3.D2 U3.D3 U3.D4 U3.D5 U3.E3 U3.E4 U3.E5 U4.2 U4.8 | length 903.5
  Top Layer w8: J2.8 1424.13,4269.13 v1(1425,4270) ; J2.7 1424.13,4660.87 v1(1425,4660) ; v1(1500,4585) 1545.82,4585 J2.1 ; U2.4 v1(1675,4225) ; R2.1 v1(1725,4725) ; v1(1745,4470) D2.2 ; v1(1750,4210) 1752.3,4207.7 1760.27,4207.7 1760.69,4207.28 1805.14,4207.28 1808.24,4204.19 1874.36,4204.19 1877.46,4207.28 R9.1 ; C3.1 v1(1760,4725) ; v1(1820,4590) D3.2 ; R6.2 v1(1830,4725) ; C7.1 v1(1865,4725) ; v1(1915,4350) 1918.25,4350 1930.72,4337.53 C2.2 1938.17,4338.22 1952.96,4338.22 1965.6,4350.86 U1.16 ; R5.2 v1(1935,4725) ; R10.1 v1(1970,4270) ; C6.1 v1(1970,4725) ; v1(1985,4460) U1.33 ; U1.32 2004.4,4579.14 2022.73,4597.47 C1.1 2027.72,4597.47 2044.96,4580.23 v1(2045.16,4580.23) ; C4.2 v1(2005,4725) ; C5.2 v1(2040,4725) ; v1@2155,4465 v1(2155,4470) ; v1(2220,4220) J3.5 ; U3.B2 U3.A1 ; v1(2330,4335) 2331.14,4333.86 2353.86,4333.86 C10.2 2359.13,4336.84 2416.82,4336.84 U4.2 ; v1@2385,4435 v1(2390,4435) ; v1(2545,4380) 2548.25,4380 2555.09,4386.84 2606.87,4386.84 U4.8 ; J1.1 2789.18,4345 v1(2830,4345) ; v1(2910,4270) 2911.27,4270 J1.7 ; v1(2910,4660) 2910.87,4660.87 J1.8
  other v1: 2360,4705
NetC11_1: C11.1 D6.3 | length 178.9
  Top Layer w8: D6.3 2641.14,4465 2684,4507.86 2716.8,4507.86 2734,4525.06 2734,4554.27 2715.98,4572.28 C11.1
NetC11_2: C11.2 R15.1 R16.2 U4.5 | length 630.3
  Top Layer w8: U4.5 2573.66,4240 2518.14,4295.52 2518.14,4438.2 2537.44,4457.49 R16.2 R15.1 2592.56,4602.91 2621.38,4631.72 2690.98,4631.72 2696.86,4625.84 2696.86,4624.87 2714.02,4607.72 C11.2
NetD4_2: D4.2 R11.2 | length 56.1
  Top Layer w8: D4.2@2584.06,4516.5 2601.71,4534.15 2631.59,4534.15 R11.2
NetD6_1: D6.1 J1.3 J1.5 R16.1 U4.6 | length 976.1
  Top Layer w8: U4.6 2650.85,4290 2658.55,4297.7 2667.7,4297.7 v1(2670,4300) 2707.54,4337.54 2707.54,4435.14 2711.81,4439.41 D6.1 2785.96,4439.41 2786.55,4440 v1(2835,4440) ; J1.5 2787.33,4540 v1(2835,4540)
  Bottom Layer w8: v1(2490,4595) 2606.06,4595 2630.06,4571 2636,4571 2655,4552 2655,4369.97 2636,4350.97 2636,4324 2646.39,4313.61 2653.14,4313.61 2666.75,4300 v1(2670,4300) ; v1(2835,4440) 2811,4464 2811,4516 v1(2835,4540)
NetD6_2: D6.2 J1.2 J1.4 R15.2 U4.7 | length 815.4
  Top Layer w8: U4.7 2673.25,4340 2694.54,4361.29 2694.54,4424.47 2691.59,4427.41 2691.59,4451.4 2708.86,4468.67 2708.86,4486.32 2713.13,4490.59 2785.17,4490.59 J1.4 2786.55,4490 v1(2835,4490) ; v1(2640,4595) R15.2 ; J1.2 2789.97,4395 v1(2835,4395)
  Bottom Layer w8: v1(2640,4595) 2670,4565 v1(2670,4340) ; v1(2835,4395) 2859,4419 2859,4466 v1(2835,4490)
NetR7_1: R7.1 R9.2 U2.6 | length 94.2
  Top Layer w8: U2.6 1842.44,4276.14 1898.86,4276.14 R7.1 R9.2
NetR8_1: R8.1 R10.2 U2.2 | length 475.7
  Top Layer w8: U2.2 1685,4325 v1(1775,4235) ; R8.1 R10.2 1971.36,4208.64 1993.64,4208.64 v1(1995,4210)
  Bottom Layer w8: v1(1775,4235) 1775,4233.9 1798.9,4210 v1(1995,4210)
NetR12_2: R12.2 U3.D1 | length 71
  Top Layer w8: U3.D1 2250.59,4696.97 R12.2
NetR13_2: R13.2 U3.B5 | length 63.4
  Top Layer w8: U3.B5 2301.77,4466.77 R13.2
NetU1_21: U1.21 U4.4 | length 466.2
  Top Layer w8: U1.21 2071,4392.92 2071,4390.06 2088.76,4372.3 2092.7,4372.3 v1(2095,4370) ; v1(2160.55,4370) 2163.8,4370 2174.35,4380.55 2251.84,4380.55 2305.42,4326.97 2305.42,4285.64 2326.95,4264.11 2359.51,4264.11 2383.62,4240 U4.4
  Bottom Layer w8: v1(2095,4370) v1(2160.55,4370)
NetU1_22: U1.22 U4.1 | length 361.3
  Top Layer w8: U1.22 2072.92,4420.46 2093.38,4400 v1(2095,4400) ; v1(2160,4400) 2269.58,4400 2271.33,4398.25 2411.73,4398.25 U4.1
  Bottom Layer w8: v1(2095,4400) v1(2160,4400)
STATUS_1: D4.1 U1.18 | length 677.9
  Top Layer w8: U1.18 2015.62,4362.09 2025,4352.71 v1(2025,4320) ; v1(2542.14,4417.5) 2578.15,4453.5 D4.1@2584.06,4453.5
  Bottom Layer w8: v1(2025,4320) 2027.3,4317.7 2044.41,4317.7 2052.12,4310 2082.24,4310 2089.24,4303 2089.39,4303 2090.39,4302 2209.61,4302 2236.49,4328.88 2318.61,4411 2425.51,4411 2432,4417.5 v1(2542.14,4417.5)
STATUS_2: D4.4 U1.19 | length 610
  Top Layer w8: U1.19 2053.23,4355.01 2053.23,4342.83 v1(2055.53,4340.53) ; D4.4@2465.94,4453.5 2471.44,4459 v1(2505,4459)
  Bottom Layer w8: v1(2055.53,4340.53) 2073.06,4323 2087.62,4323 2094.62,4316 2094.77,4316 2095.77,4315 2204.23,4315 2223.49,4334.26 2348.23,4459 v1(2505,4459)
STATUS_3: D4.3 U1.20 | length 605.2
  Top Layer w8: U1.20 2066.86,4369.22 2066.86,4363.14 2087.7,4342.3 2102.27,4342.3 v1(2104.56,4340) ; D4.3@2465.94,4516.5 2467.44,4515 v1(2505,4515)
  Bottom Layer w8: v1(2104.56,4340) 2151.88,4340 2159.33,4332.55 2203.39,4332.55 2210.49,4339.65 2345.84,4475 2465,4475 v1(2505,4515)
SWCLK: J3.4 U1.24 | length 177.6
  Top Layer w8: U1.24 2135.13,4412.3 2135.13,4361.76 2141.56,4355.33 2141.56,4328.44 J3.4
SWDIO: J3.2 U1.23 | length 161.4
  Top Layer w8: U1.23 2087.91,4434.38 2098.29,4424 2104.94,4424 2120,4408.94 2120,4358.5 2128.56,4349.94 2128.56,4330.06 2124.4,4325.89 2124.4,4304.4 J3.2
SWO: J3.6 U1.26 | length 344.5
  Top Layer w8: U1.26 2085.22,4498.32 2092.83,4505.93 2092.83,4529.2 2086.56,4535.47 v1(2086.56,4538.72) ; v1(2193.45,4356.55) 2219.26,4330.74 2219.26,4300.74 J3.6
  Bottom Layer w8: v1(2086.56,4538.72) 2086.56,4504.5 2145.06,4446 2147.94,4446 2193.45,4400.49 v1(2193.45,4356.55)
VBAT: D5.2 J1.6 | length 128.5
  Top Layer w30: D5.2 2732.01,4684.02 2767.65,4648.37 2767.65,4591.03 2770.65,4588.03 J1.6
VDDA: C4.1 C5.1 FB1.2 U1.5 | length 285.3
  Top Layer w8: U1.5 1912.62,4526.16 1905.01,4533.76 1905.01,4568.95 1981.18,4645.12 1999.68,4645.12 2005,4650.44 C4.1 C5.1 2040.98,4672.28 2046.83,4666.44 2046.83,4665.82 2054.22,4658.43 FB1.2
Vin: C9.2 D1.1 D5.1 R1.2 U2.8 U3.A2 U3.A3 U3.A4 | length 1378.7
  Top Layer w8: 1791.23,4406.37 1822.6,4375 U2.8
  Top Layer w30: v1(2515,4685) D1.1 D5.1
  Bottom Layer w8: v1(1690,4725) 1690,4721.75 1686.43,4718.18 1686.43,4633.37 1760.89,4558.92 1894.98,4558.92 ; v1(1779.72,4408.66) 1779.78,4408.72 1779.78,4443.72 1894.98,4558.92 ; v1(2405,4605) 2195.41,4605 2171.41,4629 1965.06,4629 1894.98,4558.92
  Bottom Layer w30: v1(2405,4605) 2435,4605 v1(2515,4685)
pads on no net: J3. J3.3 U1.2 U1.3 U1.9 U1.12 U1.13 U1.14 U1.15 U1.25 U1.27 U1.28 U1.29 U1.30 U1.31 U3.B1 U3.C1

## Polygon pours and split planes (outlines as drawn)
GND on Top Layer "GND_L01_P003" (solid, pour order 3): 2430,4534.8 2430,4415 2105,4415 2105,4584.8 2240,4584.8 2240,4610.41 2240.19,4610.6 2310,4610.6 2310,4549.8 2325,4534.8
GND on Top Layer "GND_L01_P002" (solid, pour order 2): 2280,4734.8 2280,4664.8 2315,4664.8 2320,4664.8 2320,4619.8 2340,4619.8 2340,4664.8 2430,4664.8 2430,4734.8
3V3 on Top Layer "3V3_L01_P000" (solid, pour order 0): 2225,4734.8 2225,4639.8 2235,4639.8 2235,4594.8 2105,4594.8 2105,4734.8
Vin on Top Layer "VIN_L01_P001" (solid, pour order 1): 2320,4619.8 2320,4544.8 2430,4544.8 2430,4654.8 2360,4654.8 2360,4619.8
GND on Bottom Layer "NONET_L-01_P-001" (solid, remove dead copper, pour order 5): 1375,4740 2960,4740 2960,4190 1375,4190
3V3 on 3V3 (split plane): 2959.9,4190.1 1375.1,4190.1 1375.1,4739.9 2959.9,4739.9
GND on GND (split plane): 2959.9,4190.1 1375.1,4190.1 1375.1,4739.9 2959.9,4739.9

## Silkscreen, mask and mechanical layers (free items; w line width, h text height)
Top Overlay:
  lines w10: 2650,4655 2650,4715
Bottom Overlay:
  drawing of 4 lines, arcs and shapes, not listed
  text "A2C Rev. 1" at 2850,4680 h60
  text "+12V" at 2955,4591.37 h60
  text "GND" at 1575,4590.15 h60
  text "Jack LeFevre / Oct 2021" at 2134.77,4558.16 h60
  text "Ain 2" at 1575,4531.37 h60
  text "CANL" at 2955,4530.21 h60
  text "Ain 1" at 1575,4471.37 h60
  text "CANH" at 2955,4470.21 h60
  text "Aout 2" at 1575,4410.76 h60
  text "CANL" at 2955,4410.21 h60
  text "Aout 1" at 1575,4350.76 h60
  text "CANH" at 2955,4350.21 h60
  text "+3.3V" at 1575,4290.65 h60
  text "GND" at 2955,4290.15 h60
Top Assembly:
  circle w10: c2120,4250 r5
  circle w10: c2169.12,4249.67 r5
  circle w10: c2220,4250 r5
  circle w10: c2220,4300 r5
  circle w10: c2170,4300 r5
  circle w10: c2120,4300 r5
  circle w10: c1645,4380 r5
  circle w10: c1615,4465 r5
  circle w10: c1695,4595 r5
  circle w10: c2585,4465 r5
  circle w10: c2610,4685 r5
  circle w10: c2555,4685 r5
  circle w10: c2355,4660 r5
  circle w10: c2385,4405 r5
  circle w10: c1985,4580 r5
  lines w8: 2120,4535 2170,4535 2170,4675 2120,4675 2120,4535 ; 2230,4685 2340,4685 2340,4730 2230,4730 2230,4685 ; 2235,4445 2320,4445 2320,4480 2235,4480 2235,4445
  lines w10: 1355,4170 2980,4170 2980,4760 1355,4760 1355,4170

## Dimensions
2980,4760 to 2980,4170 on Top Assembly
2980,4760 to 1355,4760 on Top Assembly